# Altium PCB 基于蓝牙的单片机控制系统.PcbDoc
Units mm, origin at the board's own origin, x right, y up, seen from the top; angles counter-clockwise.
Board outline 133.9 x 83.69 mm, 2 copper layers (Top Layer, Bottom Layer); 71 components, 64 nets, 242 pads, 0 vias.
Unrouted connection lines stored in the file: 18.
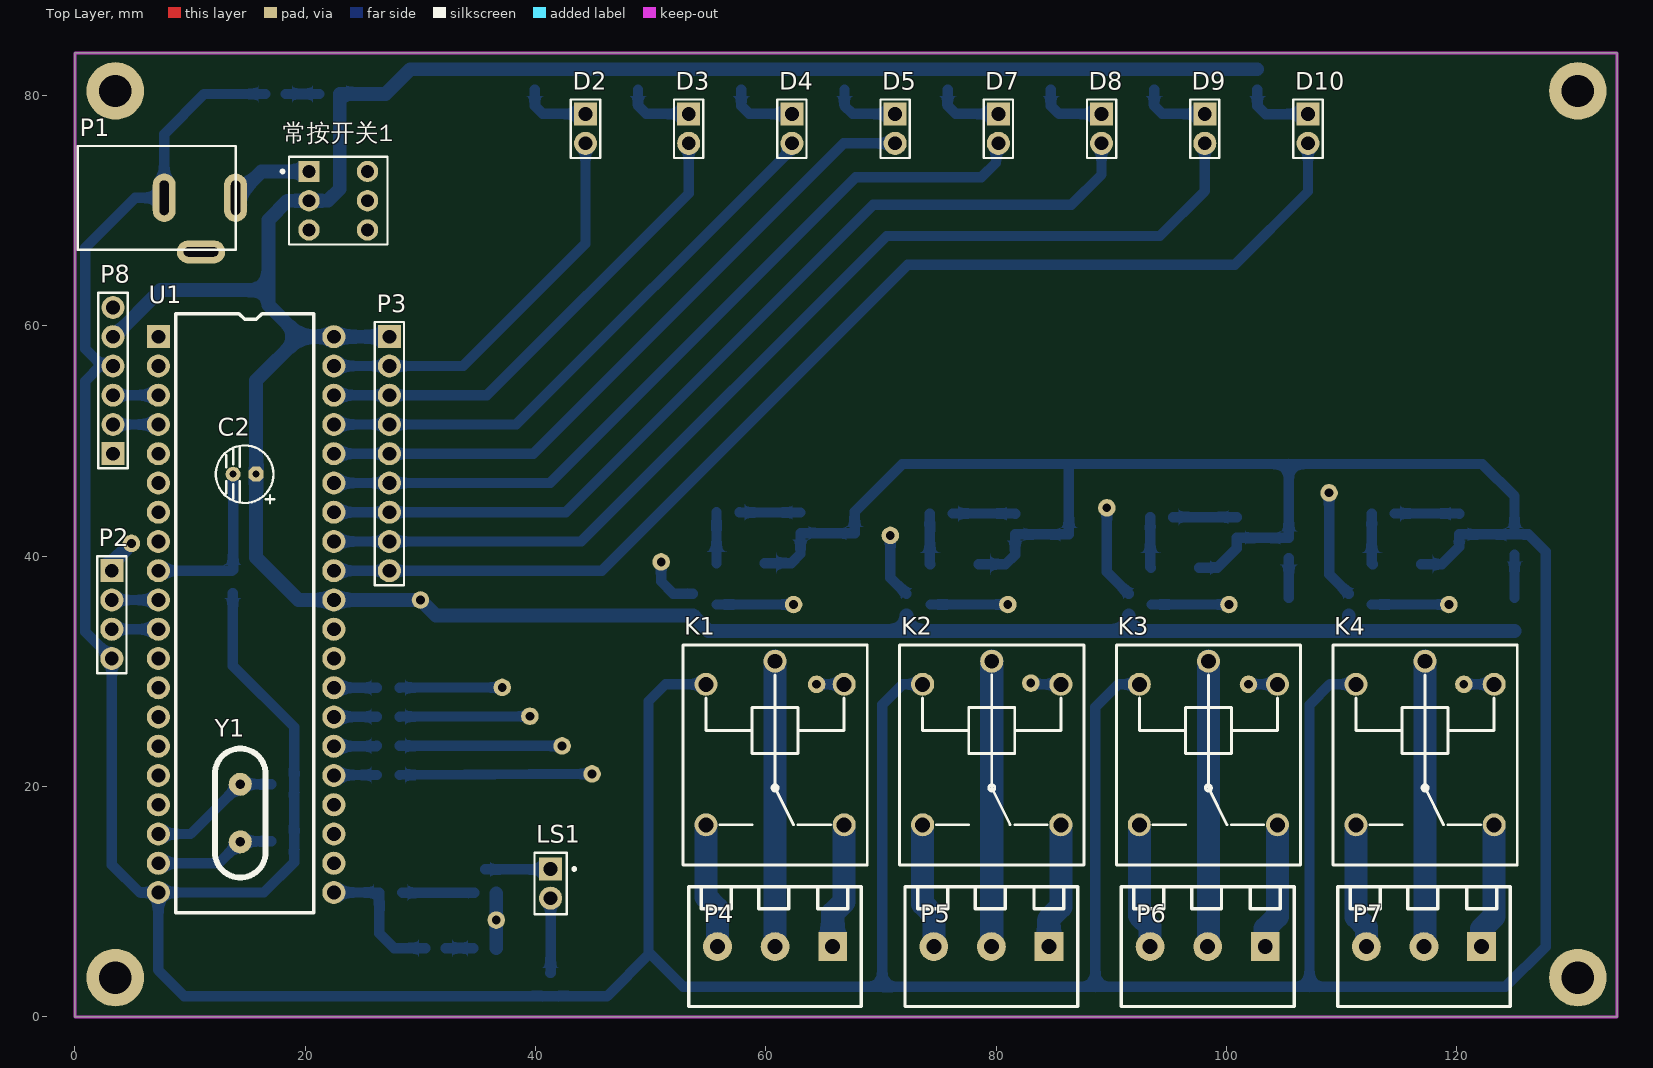
[diagram p0: Top Layer view]
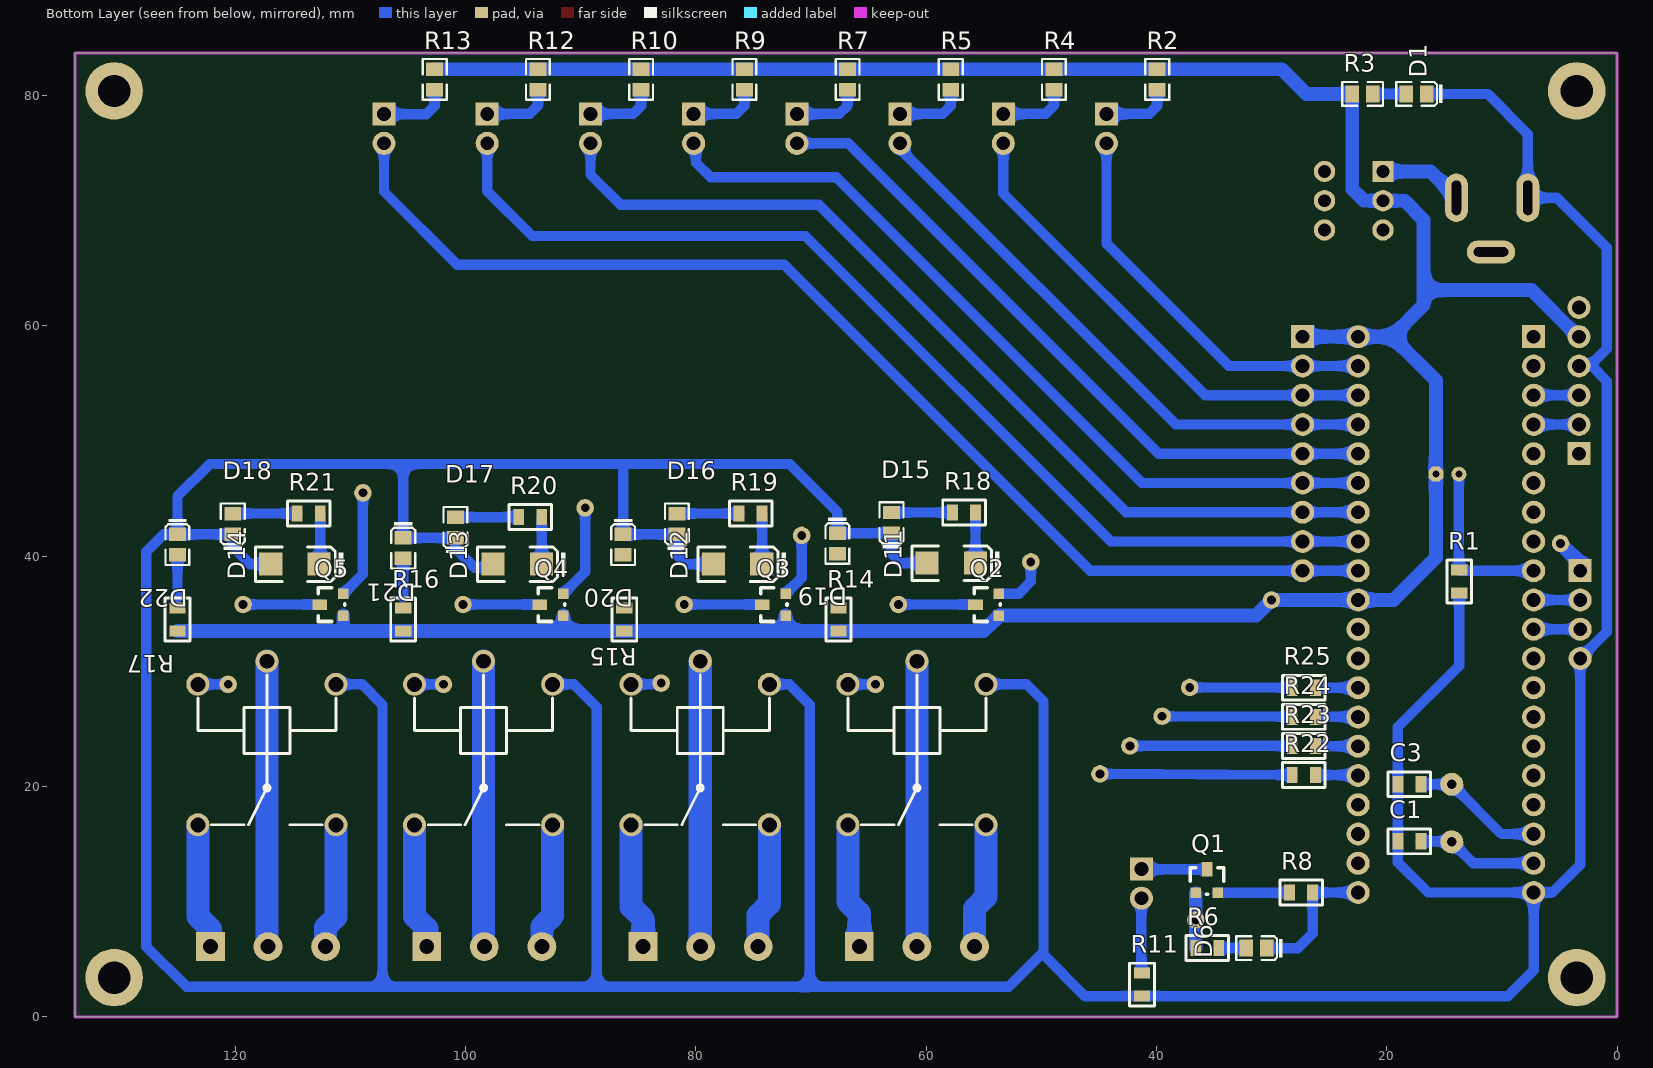
[diagram p1: Bottom Layer view, seen from below]
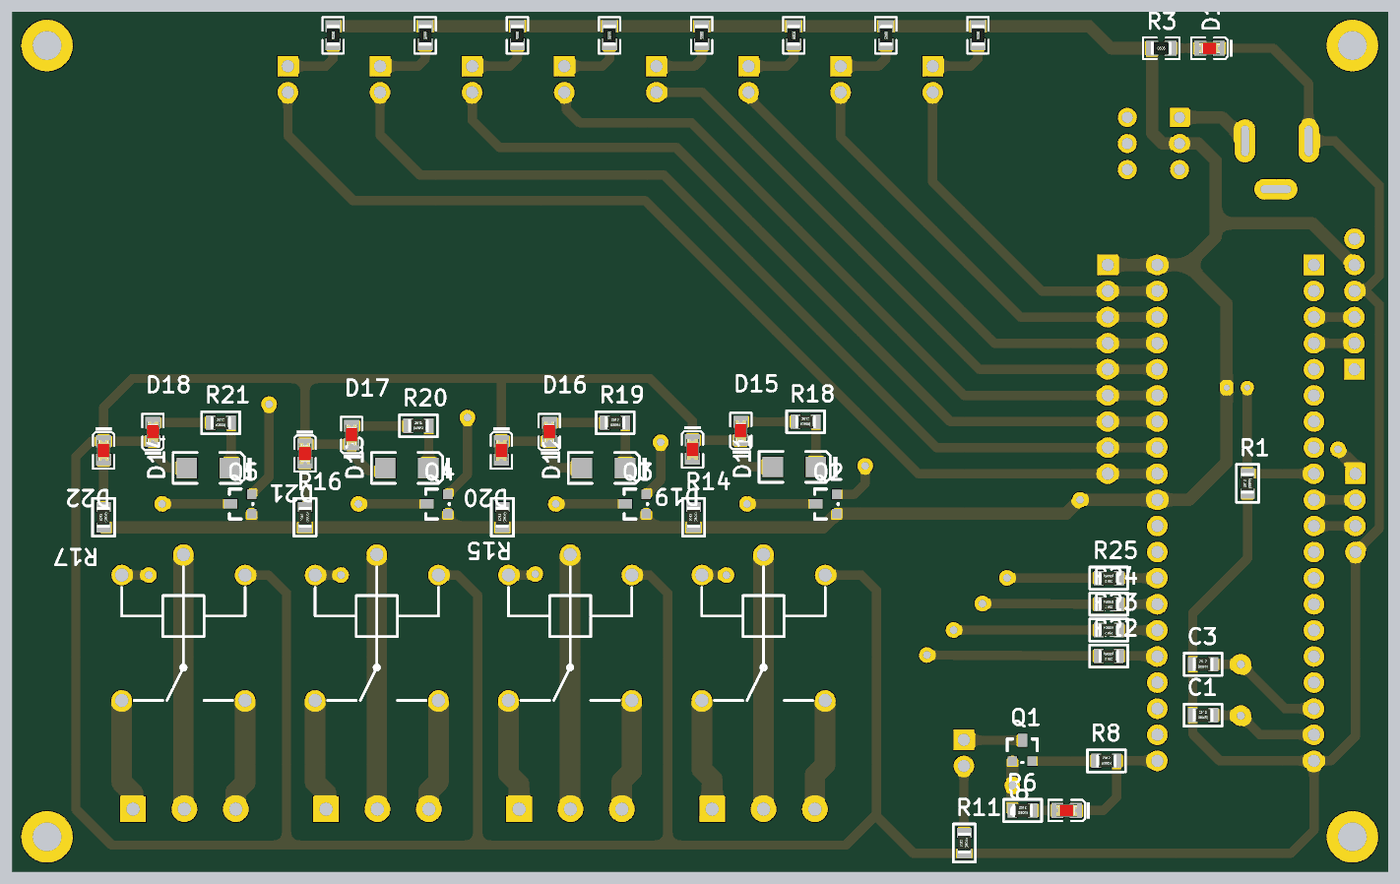
[diagram p2: 3D render of the assembled board from below, using the file's embedded part models]

## Layer stack, top to bottom
Top Solder: solder mask 0.0102, Solder Resist, Dk 3.5
Top Layer: signal copper 0.0356
Dielectric 1: dielectric 0.32, FR-4, Dk 4.8
Bottom Layer: signal copper 0.0356
Bottom Solder: solder mask 0.0102, Solder Resist, Dk 3.5

## Board outline
0,0 0,83.693 133.9,83.693 133.9,0

## Design rules (kind name [scope] priority, off if disabled: settings)
Clearance [All] p1: gap=0.254 ignorepadtopadclearanceinfootprint=FALSE except(0: Arc-Hole Track-Hole SMDPad-Hole THPad-Hole Via-Hole Fill-Hole Poly-Hole Region-Hole Text-Hole)
PolygonConnect [All] p1: connectstyle=Relief reliefconductorwidth=0.254 reliefentries=4 polygonreliefangle="90 Angle" airgapwidth=0.254
RoutingVias [All] p1: holewidth=0.711 width=1.27 viastyle="Through Hole" minholewidth=0.711 minwidth=1.27 maxholewidth=0.711 maxwidth=1.27
SolderMaskExpansion [All] p1: expansion=0.102
Width Width_1 [InNet('VCC')] p1: maxlimit=1.3 minlimit=1.2 preferedwidth=1.2
Width [All] p2: maxlimit=2 minlimit=0.9 preferedwidth=0.9
30 further rules are at their usual default settings.

## Components (designator, comment, footprint, x,y, rotation, side; value= is the part's Value field where it differs from the comment)
C1 "Cap" 0805 18.034,15.24 r180 bottom value=22pF
C2 "10uF" RB.2/.5mm 14.732,47.117 r180 top value=100pF
C3 "Cap" 0805 18.034,20.193 r180 bottom value=22pF
D1 "红灯 0805" LC-0805_LED_S1 17.399,80.137 r0 bottom
D2 "LED0" HDR1X2 44.328,78.387 r270 top
D3 "LED0" HDR1X2 53.291,78.387 r270 top
D4 "LED0" HDR1X2 62.253,78.387 r270 top
D5 "LED0" HDR1X2 71.216,78.387 r270 top
D6 "W" LC-0805_LED_S1 31.3,5.969 r0 bottom
D7 "LED0" HDR1X2 80.178,78.387 r270 top
D8 "LED0" HDR1X2 89.141,78.387 r270 top
D9 "LED0" HDR1X2 98.103,78.387 r270 top
D10 "LED0" HDR1X2 107.066,78.387 r270 top
D11 "1N4148" SMA(DO-214AC)_S5 57.8,39.4 r0 bottom
D12 "1N4148" SMA(DO-214AC)_S5 76.367,39.3 r0 bottom
D13 "1N4148" SMA(DO-214AC)_S5 95.5,39.3 r0 bottom
D14 "1N4148" SMA(DO-214AC)_S5 114.8,39.3 r0 bottom
D15 "LED" LC-0805_LED_S1 63,42.9 r90 bottom
D16 "LED" LC-0805_LED_S1 81.633,42.8 r90 bottom
D17 "LED" LC-0805_LED_S1 100.867,42.5 r90 bottom
D18 "LED" LC-0805_LED_S1 120.2,42.8 r90 bottom
D19 "LED" LC-0805_LED_S1 67.7,41.1 r270 bottom
D20 "LED" LC-0805_LED_S1 86.3,41 r270 bottom
D21 "LED" LC-0805_LED_S1 105.4,40.7 r270 bottom
D22 "LED" LC-0805_LED_S1 125,41 r270 bottom
K1 "继电器" 继电器5PIN_切换 60.792,23.876 r270 top
K2 "继电器" 继电器5PIN_切换 79.606,23.876 r270 top
K3 "继电器" 继电器5PIN_切换 98.42,23.876 r270 top
K4 "继电器" 继电器5PIN_切换 117.234,23.876 r270 top
LS1 "BEEP" PIN2 41.3,12.84 r270 top
P1 "电源" DC插座 13.947,71.12 r0 top
P2 "下载口" HDR1X4 3.2,38.735 r270 top
P3 "Header 9" HDR1X9 27.3,59.055 r270 top
P4 "Header 3" KF128-5_3 60.792,6.096 r180 top
P5 "Header 3" KF128-5_3 79.574,6.096 r180 top
P6 "Header 3" KF128-5_3 98.356,6.096 r180 top
P7 "Header 3" KF128-5_3 117.138,6.096 r180 top
P8 "Header 6" HDR1X6 3.3,48.895 r90 top
Q1 "8550" "SOT-23 MOS" 36.565,10.768 r180 bottom
Q2 "8550" "SOT-23 MOS" 53.668,34.835 r90 bottom
Q3 "8550" "SOT-23 MOS" 72.2,34.835 r90 bottom
Q4 "8550" "SOT-23 MOS" 91.5,34.835 r90 bottom
Q5 "8550" "SOT-23 MOS" 110.6,34.835 r90 bottom
R1 "10k" 0805 13.7,37.8 r90 bottom
R2 "510Ω (5100) ±1%" LC-0805_R 39.928,81.394 r270 bottom
R3 "510Ω (5100) ±1%" LC-0805_R 22.098,80.137 r180 bottom
R4 "510Ω (5100) ±1%" LC-0805_R 48.891,81.394 r270 bottom
R5 "510Ω (5100) ±1%" LC-0805_R 57.853,81.394 r270 bottom
R6 "Res2" 0805 35.581,5.969 r180 bottom value=470
R7 "510Ω (5100) ±1%" LC-0805_R 66.816,81.394 r270 bottom
R8 "Res2" 0805 27.432,10.795 r180 bottom value=100
R9 "510Ω (5100) ±1%" LC-0805_R 75.778,81.394 r270 bottom
R10 "510Ω (5100) ±1%" LC-0805_R 84.741,81.394 r270 bottom
R11 "Res2" 0805 41.26,2.8 r90 bottom value=100
R12 "510Ω (5100) ±1%" LC-0805_R 93.703,81.394 r270 bottom
R13 "510Ω (5100) ±1%" LC-0805_R 102.666,81.394 r270 bottom
R14 "4.7K" 0805 67.6,34.5 r90 bottom
R15 "4.7K" 0805 86.2,34.5 r90 bottom
R16 "4.7K" 0805 105.4,34.5 r90 bottom
R17 "4.7K" 0805 125,34.5 r90 bottom
R18 "4.7K" 0805 56.7,43.8 r180 bottom
R19 "4.7K" 0805 75.233,43.7 r180 bottom
R20 "4.7K" 0805 94.367,43.4 r180 bottom
R21 "4.7K" 0805 113.6,43.7 r180 bottom
R22 "100" 0805 27.2,21 r0 bottom value=4.7K
R23 "100" 0805 27.2,23.525 r0 bottom value=4.7K
R24 "100" 0805 27.2,26.05 r0 bottom value=4.7K
R25 "100" 0805 27.2,28.575 r0 bottom value=4.7K
U1 "STC12C5A60S2-40pin" DIP40 7.239,59.055 r0 top
Y1 "XTAL" XTAL 14.351,15.193 r90 top
常按开关1 "SW-DPDT" DPDT-6 22.86,70.866 r0 top

## Footprints (in the part's own frame and the unit in brackets; to place one, negate y for a bottom-side part, rotate by r counter-clockwise, add the part's x,y. Pads: shape width x height; smd on the part's side, far side on the other; paste and mask are expansions set on the pad)
0805 [mm] "SMD, 0805"
  rect 0.95x1.4 smd: 1(-1,0) 2(1,0)
  silkscreen extent -1.85,-1.08 1.85,1.08, body extent -1,-0.62 1,0.63, height 0.45
DC插座 [mm]
  oval 2x4.2 hole 3 slot 0.8 at 0 deg: 1(0,0) 2(-6.2,0)
  oval 4.2x2 hole 3 slot 0.8 at 90 deg: 3(-3,-4.7)
  silkscreen extent -13.7,-4.5 0,4.5
DIP40 [mm]
  rect 2x2 hole 1.2 mask+0.102: 1(0,0)
  round 2 hole 1.2 mask+0.102: 2(0,-2.54) 3(0,-5.08) 4(0,-7.62) 5(0,-10.16) 6(0,-12.7) 7(0,-15.24) 8(0,-17.78) 9(0,-20.32) 10(0,-22.86) 11(0,-25.4) 12(0,-27.94) 13(0,-30.48) 14(0,-33.02) 15(0,-35.56) 16(0,-38.1) 17(0,-40.64) 18(0,-43.18) 19(0,-45.72) 20(0,-48.26) 21(15.24,-48.26) 22(15.24,-45.72) 23(15.24,-43.18) 24(15.24,-40.64) 25(15.24,-38.1) 26(15.24,-35.56) 27(15.24,-33.02) 28(15.24,-30.48) 29(15.24,-27.94) 30(15.24,-25.4) 31(15.24,-22.86) 32(15.24,-20.32) 33(15.24,-17.78) 34(15.24,-15.24) 35(15.24,-12.7) 36(15.24,-10.16) 37(15.24,-7.62) 38(15.24,-5.08) 39(15.24,-2.54) 40(15.24,0)
  silkscreen extent 1.5,-50 13.5,2
DPDT-6 [mm] "Switch; 6 Leads"
  rect 1.85x1.85 hole 1.1: 1(-2.54,2.54)
  round 1.85 hole 1.1: 2(-2.54,0) 3(-2.54,-2.54) 4(2.54,-2.54) 5(2.54,0) 6(2.54,2.54)
  silkscreen extent -4.96,-3.81 4.28,3.81
HDR1X2 [mm] "Connector; Header; 2 Position"
  rect 2x2 hole 1.2: 1(0,0)
  round 2 hole 1.2: 2(2.54,0)
  silkscreen extent -1.27,-1.27 3.81,1.27
HDR1X4 [mm] "Connector; Header; 4 Position"
  rect 2x2 hole 1.2: 1(0,0)
  round 2 hole 1.2: 2(2.54,0) 3(5.08,0) 4(7.62,0)
  silkscreen extent -1.27,-1.27 8.89,1.27
HDR1X6 [mm] "Connector; Header; 6 Position"
  rect 2x2 hole 1.2: 1(0,0)
  round 2 hole 1.2: 2(2.54,0) 3(5.08,0) 4(7.62,0) 5(10.16,0) 6(12.7,0)
  silkscreen extent -1.27,-1.27 13.97,1.27
HDR1X9 [mm] "Connector; Header; 9 Position"
  rect 2x2 hole 1.2: 1(0,0)
  round 2 hole 1.2: 2(2.54,0) 3(5.08,0) 4(7.62,0) 5(10.16,0) 6(12.7,0) 7(15.24,0) 8(17.78,0) 9(20.32,0)
  silkscreen extent -1.27,-1.27 21.59,1.27
KF128-5_3 [mm]
  rect 2.5x2.5 hole 1.3: 1(-5,0)
  round 2.5 hole 1.3: 2(0,0) 3(5,0)
  silkscreen extent -7.5,-5.2 7.5,5.2
LC-0805_LED_S1 [mm]
  rect 1.16x1.47 smd: A(0.89,0) K(-0.89,0)
  silkscreen extent -2.24,-1.04 1.77,1.03, body extent -1.01,-0.63 1.01,0.62, height 1.1
LC-0805_R [mm]
  rect 1.16x1.47 smd: 1(-0.89,0) 2(0.89,0)
  silkscreen extent -1.77,-1.04 1.77,1.03, body extent -1,-0.63 1,0.63, height 0.49
PIN2 [mm] "Photosensitive Diode; 2 Leads"
  rect 2x2 hole 1.2: 1(0,0)
  round 2 hole 1.2: 2(2.54,0)
  silkscreen extent -1.4,-1.4 3.94,2.18
RB.2/.5mm [mm]
  oct 1.3x1.3 hole 0.6: 1(-1,0)
  round 1.3 hole 0.6: 2(1,0)
  silkscreen extent -2.58,-2.5 2.5,2.55
SMA(DO-214AC)_S5 [mm]
  rect 2x2 smd mask+0.102: 1(2.1,0) 2(-2.1,0)
  silkscreen extent -4.2,-1.5 3.43,1.5
"SOT-23 MOS" [mil]
  rect 36x36 smd: 1(0,0) 2(75,0)
  rect 36x50 smd: 3(38,80)
  silkscreen extent -20,-5 95,85
XTAL [mm]
  round 2 hole 0.8: 1(0,0) 2(5,0)
  silkscreen extent -3.1,-2.2 8.1,2.2
继电器5PIN_切换 [mm]
  round 2 hole 1.3 mask+0.102: 1(-5,6) 2(-7,0) 3(-5,-6) 4(7.2,-6) 5(7.2,6)
  silkscreen extent -8.4,-8 10.7,8

## Part data
C1 C3: "Capacitor", LatestRevisionDate=17-Jul-2002, LatestRevisionNote="Re-released for DXP Platform.", PackageDescription="Radial Cap, Thru-Hole; 2 Leads; 0.3 in Pin Spacing", PackageReference=RAD-0.3, Published=8-Jun-2000, Publisher="Altium Limited"
C2: library part "Cap Pol2", "Polarized Capacitor (Axial)", LatestRevisionDate=17-Jul-2002, LatestRevisionNote="Re-released for DXP Platform.", PackageDescription="Polarized Capacitor; 2 Leads", PackageReference=POLAR0.8, Published=8-Jun-2000, Publisher="Altium Limited"
D1: library part "0805 红灯", "发光二极管", Package=0805, SuppliersPartNumber=C2295, ComponentLink1Description=供应商, ComponentLink1URL=http://www.szlcsc.com/product/details_2668.html, Supplier=LC
D2 D3 D4 D5 D7 D8 D9 D10: "Typical INFRARED GaAs LED", LatestRevisionDate=08-Jul-2005, LatestRevisionNote="Mech Layer 1 removed.", PackageDescription="LED; 2 Leads", PackageReference=LED-0, Published=8-Jun-2000, Publisher="Altium Limited"
D6: library part LED
D11 D12 D13 D14: library part "Diode 1N4148", "High Conductance Fast Diode", Code_JEDEC=DO-204-AH, ComponentLink1Description="Manufacturer Link", ComponentLink1URL=http://www.fairchildsemi.com/, ComponentLink2Description=Datasheet, ComponentLink2URL=http://www.fairchildsemi.com/ds/1N%2F1N4148.pdf, DatasheetVersion=1997, LatestRevisionDate=17-Jul-2002, LatestRevisionNote="Re-released for DXP Platform.", PackageDescription="Diode, Axial; Body 3.8 x 1.9 mm (LxDia. max), Lead Dia. 0.53 mm (max)", PackageReference=DO-35, Published=8-Jun-2000, Publisher="Altium Limited"
K1 K2 K3 K4: library part 松乐继电器5V-5PIN
LS1: library part Bell, "Electrical Bell", LatestRevisionDate=17-Jul-2002, LatestRevisionNote="Re-released for DXP Platform.", PackageReference=PIN2, Published=24-Mar-1999, Publisher="Altium Limited"
P1: library part "Header 2", "Header, 2-Pin", LatestRevisionDate=17-Jul-2002, LatestRevisionNote="Re-released for DXP Platform.", Publisher="Altium Limited"
P2: library part "Header 4", "Header, 4-Pin", LatestRevisionDate=17-Jul-2002, LatestRevisionNote="Re-released for DXP Platform.", Publisher="Altium Limited"
P3: "Header, 9-Pin", LatestRevisionDate=17-Jul-2002, LatestRevisionNote="Re-released for DXP Platform.", Publisher="Altium Limited"
P4 P5 P6 P7: "Header, 3-Pin", LatestRevisionDate=17-Jul-2002, LatestRevisionNote="Re-released for DXP Platform.", Publisher="Altium Limited"
P8: "Header, 6-Pin", LatestRevisionDate=17-Jul-2002, LatestRevisionNote="Re-released for DXP Platform.", Publisher="Altium Limited"
Q1 Q2 Q3 Q4 Q5: library part 2N3906, "PNP General Purpose Amplifier", ComponentLink1Description="Manufacturer Link", ComponentLink1URL=http://www.fairchildsemi.com/, ComponentLink2Description=Datasheet, ComponentLink2URL=http://www.fairchildsemi.com/ds/2N%2F2N3906.pdf, DatasheetVersion=1997, LatestRevisionDate=15-Jan-2003, LatestRevisionNote="PCB Footprint 'BCY-W3/D4.7' replaced", PackageDescription="TO, Flat Index; 3 In-Line, Axial Leads; Body Dia. 4.5mm; Leads 0.51 x 0.48 mm (max)", PackageReference=TO-92A, PackageVersion=Sep-1998, Published=8-Jun-2000, Publisher="Altium Limited"
R1: library part RES5
R2 R3 R4 R5 R7 R9 R10 R12 R13: library part "0805 510Ω (5100) 1%", "贴片电阻", Package=0805, SuppliersPartNumber=C17734, ComponentLink1Description=供应商, ComponentLink1URL=http://www.szlcsc.com/product/details_18422.html, Supplier=LC
R6 R8 R11: "Resistor", LatestRevisionDate=17-Jul-2002, LatestRevisionNote="Re-released for DXP Platform.", PackageDescription="Axial Device, Thru-Hole; 2 Leads; 0.4 in Pin Spacing", PackageReference=AXIAL-0.4, Published=8-Jun-2000, Publisher="Altium Limited"
R14 R15 R16 R17 R18 R19 R20 R21 R22 R23 R24 R25: library part Res2, "Resistor", LatestRevisionDate=17-Jul-2002, LatestRevisionNote="Re-released for DXP Platform.", PackageDescription="Axial Device, Thru-Hole; 2 Leads; 0.4 in Pin Spacing", PackageReference=AXIAL-0.4, Published=8-Jun-2000, Publisher="Altium Limited"
Y1: "Crystal Oscillator", LatestRevisionDate=17-Jul-2002, LatestRevisionNote="Re-released for DXP Platform.", PackageDescription="Crystal, Thru-Hole; 2 Leads; Body 3.1 x 8.2 mm (Dia.xH)", PackageReference=R38, Published=8-Jun-2000, Publisher="Altium Limited"
常按开关1: "Double-Pole, Double-Throw Switch", LatestRevisionDate=17-Jul-2002, LatestRevisionNote="Re-released for DXP Platform.", PackageDescription="Switch; 6 Leads", PackageReference=DPDT-6, Published=24-Mar-1999, Publisher="Altium Limited"

## Free pads (board coordinates)
  round 5 hole 2.8: 0(3.5,3.4) 0(3.5,80.4) 0(130.5,3.4) 0(130.5,80.4)
  round 1.524 hole 0.762: 2(4.9,41.11) 5(37.1,28.6) 6(39.5,26.1) 7(42.3,23.525) 9(36.581,8.4) 10(30,36.195) 11(44.9,21.094) 12(62.4,35.8) 12(64.4,28.876) 12(81,35.8) 12(83,28.976) 12(100.203,35.8) 12(101.9,28.876) 12(119.3,35.8) 12(120.6,28.876) 14(70.8,41.8) 15(50.9,39.5) 16(89.6,44.2) 17(108.9,45.5)

## Nets (pads, with @x,y where several pads share a name; then routed paths per layer and width w, separated by ;. In a path a pad name is that pad's centre, name@x,y a point inside that pad or via, vN(x,y) a via of type N, cw(c..) or ccw(c..) an arc to the next point about the centre after c; other vN are vias at no path point)
BEEP: D6.K R8.2 U1.21 | length 12
  Bottom Layer w0.9: U1.21 R8.2 26.432,7.268 27.731,5.969 D6.K
GND: C1.1 C3.1 D1.K D11.1 D12.1 D13.1 D14.1 D15.K D16.K D17.K D18.K D19.K D20.K D21.K D22.K K1.3 K2.3 K3.3 K4.3 P1.2 P2.4 P8.4 R1.1 R11.1 U1.20 | length 526.3
  Bottom Layer w0.9: P8.4 P8.4@2.37,56.515 ; R1.1 13.7,30.5 19.034,25.166 C3.1 C1.1 19.034,13.434 16.395,10.795 U1.20 ; D1.K 11.237,80.137 7.747,76.647 P1.2 5.22,71.12 0.885,66.785 0.885,58 P8.4@2.37,56.515 ; K1.3 51.276,28.876 49.8,27.4 49.8,5.5 49.9,5.5 ; D11.1 62.2,39.4 63,40.2 D15.K 63.02,41.99 D19.K 67.7,43.855 71.845,48 86.1,48 ; K2.3 71.876,28.876 70.1,27.1 70.1,2.6 ; D12.1 80.8,39.3 81.633,40.133 D16.K 81.653,41.89 D20.K 86.3,47.8 86.1,48 ; K3.3 90.576,28.876 88.6,26.9 88.6,2.6 ; D13.1@97.633,39 99.2,39 100.867,40.667 D17.K 100.887,41.59 D21.K 105.4,48 ; K4.3 108.976,28.876 107.2,27.1 107.2,2.6 ; D14.1 118.7,39.3 120.2,40.8 D18.K 120.22,41.89 D22.K ; P8.4@2.37,56.515 2.2,56.515 0.885,55.2 0.885,33.43 P2.4 3.2,13.2 5.605,10.795 U1.20 ; U1.20 7.239,4.061 9.5,1.8 R11.1 46.2,1.8 49.9,5.5 ; 49.9,5.5 52.8,2.6 70.1,2.6 ; 70.1,2.6 88.6,2.6 ; 86.1,48 105.4,48 ; 88.6,2.6 107.2,2.6 ; 105.4,48 122.2,48 125,45.2 D22.K ; 107.2,2.6 124.2,2.6 127.7,6.1 127.7,40.4 126.21,41.89 D22.K
JDQ1: R22.1 U1.25 | length 3.7
  Bottom Layer w0.9: U1.25 22.524,21 R22.1
JDQ2: R23.1 U1.26 | length 3.7
  Bottom Layer w0.9: U1.26 26.17,23.495 R23.1
JDQ3: R24.1 U1.27 | length 3.7
  Bottom Layer w0.9: U1.27 22.494,26.05 R24.1
JDQ4: R25.1 U1.28 | length 3.7
  Bottom Layer w0.9: U1.28 R25.1
LED_0: D2.2 P3.2 U1.39 | length 35
  Bottom Layer w0.9: U1.39 P3.2 33.715,56.515 44.328,67.128 D2.2
LED_1: D3.2 P3.3 U1.38 | length 42.4
  Bottom Layer w0.9: U1.38 P3.3 35.775,53.975 53.291,71.491 D3.2
LED_2: D4.2 P3.4 U1.37 | length 50.2
  Bottom Layer w0.9: U1.37 P3.4 38.335,51.435 62.253,75.353 D4.2
LED_3: D5.2 P3.5 U1.36 | length 59.9
  Bottom Layer w0.9: U1.36 P3.5 39.795,48.895 66.747,75.847 D5.2
LED_4: D7.2 P3.6 U1.35 | length 70.8
  Bottom Layer w0.9: U1.35 P3.6 41.255,46.355 67.8,72.9 78.7,72.9 79.975,74.175 79.975,75.644 D7.2
LED_5: D8.2 P3.7 U1.34 | length 81.5
  Bottom Layer w0.9: U1.34 P3.7 42.615,43.815 69.3,70.5 86.5,70.5 89.141,73.141 D8.2
LED_6: D9.2 P3.8 U1.33 | length 92.4
  Bottom Layer w0.9: U1.33 P3.8 43.975,41.275 70.5,67.8 94.2,67.8 98.103,71.703 D9.2
LED_7: D10.2 P3.9 U1.32 | length 102.4
  Bottom Layer w0.9: U1.32 P3.9 45.735,38.735 72.3,65.3 100.7,65.3 107.066,71.666 D10.2
NetD1_A: D1.A R3.2 | length 2.9
  Bottom Layer w0.9: D1.A R3.2
NetD2_1: D2.1 R2.2 | length 6.1
  Bottom Layer w0.9: R2.2 39.928,79.104 40.628,78.404 44.311,78.404 D2.1
NetD3_1: D3.1 R4.2 | length 6.1
  Bottom Layer w0.9: R4.2 48.891,79.104 49.591,78.404 53.274,78.404 D3.1
NetD4_1: D4.1 R5.2 | length 6.1
  Bottom Layer w0.9: R5.2 57.853,79.104 58.553,78.404 62.236,78.404 D4.1
NetD5_1: D5.1 R7.2 | length 6.1
  Bottom Layer w0.9: R7.2 66.816,79.104 67.516,78.404 71.199,78.404 D5.1
NetD6_A: D6.A R6.2 | length 2.4
  Bottom Layer w0.9: D6.A R6.2
NetD7_1: D7.1 R9.2 | length 6.1
  Bottom Layer w0.9: R9.2 75.778,79.104 76.478,78.404 80.161,78.404 D7.1
NetD8_1: D8.1 R10.2 | length 6.1
  Bottom Layer w0.9: R10.2 84.741,79.104 85.441,78.404 89.124,78.404 D8.1
NetD9_1: D9.1 R12.2 | length 6.1
  Bottom Layer w0.9: R12.2 93.703,79.104 94.403,78.404 98.086,78.404 D9.1
NetD10_1: D10.1 R13.2 | length 6.1
  Bottom Layer w0.9: R13.2 102.666,79.104 103.383,78.387 D10.1
NetD11_2: D11.2 K1.1 pad.12@62.4,35.8 pad.12@64.4,28.876 Q2.3 R18.2 | length 13.5
  Bottom Layer w0.9: Q2.3 pad.12@62.4,35.8 ; D11.2 R18.2 ; pad.12@64.4,28.876 K1.1
NetD12_2: D12.2 K2.1 pad.12@81,35.8 pad.12@83,28.976 Q3.3 R19.2 | length 13.3
  Bottom Layer w0.9: R19.2 74.233,39.333 D12.2 ; Q3.3@74.3,35.8 pad.12@81,35.8 ; pad.12@83.714,28.876 K2.1@85.93,28.876
NetD13_2: D13.2 K3.1 pad.12@100.203,35.8 pad.12@101.9,28.876 Q4.3 R20.2 | length 14
  Bottom Layer w0.9: R20.2 93.367,39.067 D13.2@93.433,39 ; Q4.3@93.503,35.8 pad.12@100.203,35.8 ; pad.12@101.9,28.876 K3.1@104.744,28.876
NetD14_2: D14.2 K4.1 pad.12@119.3,35.8 pad.12@120.6,28.876 Q5.3 R21.2 | length 14.1
  Bottom Layer w0.9: Q5.3@112.6,35.8 pad.12@119.3,35.8 ; R21.2 112.6,39.4 D14.2 ; pad.12@120.6,28.876 K4.1@123.558,28.876
NetD15_A: D15.A R18.1 | length 5.3
  Bottom Layer w0.9: R18.1 57.71,43.79 D15.A
NetD16_A: D16.A R19.1 | length 5.4
  Bottom Layer w0.9: R19.1 81.623,43.7 D16.A
NetD17_A: D17.A R20.1 | length 5.5
  Bottom Layer w0.9: R20.1 95.377,43.39 D17.A
NetD18_A: D18.A R21.1 | length 5.6
  Bottom Layer w0.9: R21.1 120.19,43.7 D18.A
NetD19_A: D19.A R14.2
NetD20_A: D20.A R15.2
NetD21_A: D21.A R16.2 | length 3.4
  Bottom Layer w0.9: 105.4,36.4 D21.A
NetD22_A: D22.A R17.2 | length 3.7
  Bottom Layer w0.9: 125,36.368 D22.A
NetK1_2: K1.2 P4.2 | length 24.8
  Bottom Layer w2: P4.2 K1.2
NetK1_4: K1.4 P4.3 | length 11
  Bottom Layer w2: K1.4 54.792,10.408 55.792,9.408 P4.3
NetK1_5: K1.5 P4.1 | length 11
  Bottom Layer w2: P4.1 65.792,8.992 66.792,9.992 K1.5
NetK2_2: K2.2 P5.2 | length 24.8
  Bottom Layer w0.9: P5.2 P5.2@79.606,6.128
  Bottom Layer w2: P5.2@79.606,6.128 K2.2
NetK2_4: K2.4 P5.3 | length 11
  Bottom Layer w2: K2.4 73.606,9.802 74.574,8.834 P5.3
NetK2_5: K2.5 P5.1 | length 11
  Bottom Layer w2: P5.1 84.574,8.508 85.606,9.54 K2.5
NetK3_2: K3.2 P6.2 | length 24.8
  Bottom Layer w0.9: P6.2 P6.2@98.42,6.16
  Bottom Layer w2: P6.2@98.42,6.16 K3.2
NetK3_4: K3.4 P6.3 | length 11
  Bottom Layer w2: K3.4 92.42,8.78 93.356,7.844 P6.3
NetK3_5: K3.5 P6.1 | length 11
  Bottom Layer w2: P6.1 103.356,7.656 104.42,8.72 K3.5
NetK4_2: K4.2 P7.2 | length 24.8
  Bottom Layer w0.9: P7.2 P7.2@117.234,6.192
  Bottom Layer w2: P7.2@117.234,6.192 K4.2
NetK4_4: K4.4 P7.3 | length 11
  Bottom Layer w2: K4.4 111.234,8.666 112.138,7.762 P7.3
NetK4_5: K4.5 P7.1 | length 11
  Bottom Layer w2: P7.1 122.138,7.638 123.234,8.734 K4.5
NetLS1_1: LS1.1 Q1.3 | length 5.7
  Bottom Layer w0.9: Q1.3 41.26,12.8 LS1.1
NetLS1_2: LS1.2 R11.2 | length 6.5
  Bottom Layer w0.9: R11.2 41.3,3.84 LS1.2
NetQ1_2: Q1.2 R8.1 | length 6.2
  Bottom Layer w0.9: R8.1 28.459,10.768 Q1.2
NetQ2_2: pad.11 pad.15 Q2.2 R22.2 | length 21.6
  Bottom Layer w0.9: R22.2 pad.11 ; pad.15 50.9,37.8 51.96,36.74 Q2.2
NetQ3_2: pad.7 pad.14 Q3.2 R23.2 | length 19.7
  Bottom Layer w0.9: R23.2 pad.7 ; pad.14 70.8,38.14 Q3.2
NetQ4_2: pad.6 pad.16 Q4.2 R24.2 | length 19.5
  Bottom Layer w0.9: R24.2 pad.6 ; pad.16 89.6,38.64 Q4.2
NetQ5_2: pad.5 pad.17 Q5.2 R25.2 | length 18.4
  Bottom Layer w0.9: R25.2 pad.5 ; pad.17 108.9,38.44 Q5.2
RST: C2.2 R1.2 U1.9 | length 14.8
  Bottom Layer w0.9: U1.9 13.635,38.735 R1.2 13.732,38.832 C2.2
RXD: P2.2 U1.10 | length 4
  Bottom Layer w0.9: P2.2 U1.10
RXD2: P8.3 U1.3 | length 3.9
  Bottom Layer w0.9: P8.3 U1.3
TXD: P2.3 U1.11 | length 4
  Bottom Layer w0.9: P2.3 U1.11
TXD2: P8.2 U1.4 | length 3.9
  Bottom Layer w0.9: P8.2 U1.4
VCC: C2.1 P2.1 P3.1 P8.5 pad.2 pad.9 pad.10 Q1.1 Q2.1 Q3.1 Q4.1 Q5.1 R2.1 R3.1 R4.1 R5.1 R6.1 R7.1 R9.1 R10.1 R12.1 R13.1 R14.1 R15.1 R16.1 R17.1 U1.31 U1.40 常按开关1.2 | length 274.9
  Bottom Layer w1.2: P2.1 3.2,39.41 pad.2 ; P8.5 3.382,59.055 7.427,63.1 16.8,63.1 ; P3.1 U1.40 19.545,59.055 ; R6.1 pad.9 Q1.1@36.581,10.7 ; Q3.1 72.2,33.5 ; Q4.1 91.5,33.5 ; R13.1 R12.1 R10.1 R9.1 R7.1 R5.1 R4.1 R2.1 29.116,82.284 26.969,80.137 R3.1 22.988,71.888 21.966,70.866 常按开关1.2 18.466,70.866 16.8,69.2 16.8,63.1 ; Q5.1 110.6,33.6 110.5,33.5 ; R17.1 110.5,33.5 ; 16.8,63.1 16.8,61.8 19.545,59.055 ; 19.545,59.055 15.732,55.242 C2.1 15.732,39.868 19.405,36.195 U1.31 pad.10 31.36,34.835 Q2.1 55.003,33.5 R14.1 72.2,33.5 ; 72.2,33.5 R15.1 91.5,33.5 ; 91.5,33.5 R16.1 110.5,33.5
VCC_sw: P1.1 常按开关1.1 | length 7.3
  Bottom Layer w0.9: P1.1 P1.1@13.947,71.147
  Bottom Layer w1.2: P1.1@13.947,71.147 16.206,73.406 常按开关1.1
X1: C1.2 U1.19 Y1.1 | length 10.6
  Bottom Layer w0.9: U1.19 12.493,13.335 Y1.1 14.398,15.24 C1.2
X2: C3.2 U1.18 Y1.2 | length 11.6
  Bottom Layer w0.9: U1.18 10.033,15.875 Y1.2 C3.2
pads on no net: P1.3 P8.1 P8.6 U1.1 U1.2 U1.5 U1.6 U1.7 U1.8 U1.12 U1.13 U1.14 U1.15 U1.16 U1.17 U1.22 U1.23 U1.24 U1.29 U1.30 常按开关1.3 常按开关1.4 常按开关1.5 常按开关1.6

## Keep-outs
Keep-Out Layer:
  the board outline again, w0.254